# EAGLE board CT_schematic (EAGLE 7.6.0)

Size 100 x 80 mm. Coordinates in mm from the lower left corner, seen from the top.
Outline: 0,0 100,0 100,80 0,80 0,0
Copper layers (1*16): Top 0.035mm / dielectric 1.5mm / Bottom 0.035mm
Design rules "default": minimum track width 10mil, minimum drill 24mil, track to track 8mil, track to pad 8mil, pad to pad 8mil, via to via 8mil, smd to smd 8mil, copper to edge 40mil, drill to drill 8mil, minimum pad ring 10mil, minimum via ring 8mil, stop-mask expansion 4mil, vias tented up to drill 0mil, thermal gap 10mil

## Footprints (pad centres in the part's own frame; a part is rotated, then mirrored left to right if it is on the bottom)
C0603 = smd 0.8 x 0.8: 1 -0.762,0; 2 0.762,0
C0402 = smd 0.5 x 0.5: 1 -0.508,0; 2 0.508,0
C0805 = smd 1.2 x 1.3: 1 -1.016,0; 2 1.016,0
C1210 = smd 1.2 x 2.5: 1 -1.524,0; 2 1.524,0
EXV-9H = smd 3.505 x 1.676: 1 -2.857,0; 2 2.857,0
L0603 = smd 0.8 x 0.8: 1 -0.762,0; 2 0.762,0
DR1040 = smd 1.6 x 3.2: 1 -4.458,0; 2 4.458,0
PJ-037B_PACKAGE = drill 3.7 square: 1 12,0 | drill 3.2 square: 2 6,0
R0603 = smd 0.8 x 0.8: 1 -0.762,0; 2 0.762,0
WLCSP66_8X8 = smd 0.229 x 0.229: A1 -1.4,1.6; A2 -1,1.6; A3 -0.6,1.6; A4 -0.2,1.6; A5 0.2,1.6; A6 0.6,1.6; A7 1,1.6; A8 1.4,1.6; B1 -1.4,1.2; B2 -1,1.2; B3 -0.6,1.2; B4 -0.2,1.2; B5 0.2,1.2; B6 0.6,1.2; B7 1,1.2; B8 1.4,1.2; C1 -1.4,0.8; C2 -1,0.8; C3 -0.6,0.8; C4 -0.2,0.8; C5 0.2,0.8; C6 0.6,0.8; C7 1,0.8; C8 1.4,0.8; D1 -1.4,0.4; D2 -1,0.4; D3 -0.6,0.4; D6 0.6,0.4; D7 1,0.4; D8 1.4,0.4; E1 -1.4,0; E2 -1,0; E3 -0.6,0; E6 0.6,0; E7 1,0; E8 1.4,0; F1 -1.4,-0.4; F2 -1,-0.4; F3 -0.6,-0.4; F6 0.6,-0.4; F7 1,-0.4; F8 1.4,-0.4; G1 -1.4,-0.8; G2 -1,-0.8; G3 -0.6,-0.8; G4 -0.2,-0.8; G5 0.2,-0.8; G6 0.6,-0.8; G7 1,-0.8; G8 1.4,-0.8; H1 -1.4,-1.2; H2 -1,-1.2; H3 -0.6,-1.2; H4 -0.2,-1.2; H5 0.2,-1.2; H6 0.6,-1.2; H7 1,-1.2; H8 1.4,-1.2; J1 -1.4,-1.6; J2 -1,-1.6; J3 -0.6,-1.6; J4 -0.2,-1.6; J5 0.2,-1.6; J6 0.6,-1.6; J7 1,-1.6; J8 1.4,-1.6
A2200-A = smd 1.5 x 0.8: 1 -4.85,6.35; 2 -4.85,5.08; 3 -4.85,3.81; 4 -4.85,2.54; 5 -4.85,1.27; 6 -4.85,0; 7 -4.85,-1.27; 8 -4.85,-2.54; 9 -4.85,-3.81; 10 -4.85,-5.08; 11 -4.85,-6.35; 12 4.85,-6.35; 13 4.85,-5.08; 14 4.85,-3.81; 15 4.85,-2.54; 16 4.85,-1.27; 17 4.85,0; 18 4.85,1.27; 19 4.85,2.54; 20 4.85,3.81; 21 4.85,5.08; 22 4.85,6.35 | smd 1.2 x 1.2: 23 -2,2; 24 -2,0; 25 -2,-2; 26 0,-2; 27 0,0; 28 0,2; 29 2,2; 30 2,0; 31 2,-2
COAXIAL_C = smd 1 x 1: 1 0,-1.5; 2 0,1.5 | smd 1.05 x 2.2: 3 -1.475,0; 4 1.475,0
SAMTEC_FTSH-105-01-L-DV-K = smd 0.762 x 2.794: 1 -2.54,-2.032; 2 -2.54,2.032; 3 -1.27,-2.032; 4 -1.27,2.032; 5 0,-2.032; 6 0,2.032; 7 1.27,-2.032; 8 1.27,2.032; 9 2.54,-2.032; 10 2.54,2.032
TDFN-8/6MM = smd 0.3 x 0.75: 1 0,0; 2 0.5,0; 3 1,0; 4 1.5,0; 5 1.5,3; 6 1,3; 7 0.5,3; 8 0,3
ASEK = smd 1.4 x 1: 1 -1.1,-0.8; 2 1.1,-0.8; 3 1.1,0.8; 4 -1.1,0.8
ASDMB-XX.XXXXMHZ-XX-XX-XXX = smd 0.65 x 0.85: 1 0.45,0.2; 2 2.05,0.2; 3 2.05,1.8; 4 0.45,1.8
TSOT-23-5 = smd 1.3 x 0.62: 1 -1.31,0.95; 2 -1.31,0; 3 -1.31,-0.95; 4 1.31,-0.95; 5 1.31,0.95
WSON-8 = smd 0.3 x 0.6: 1 -0.75,0; 2 0.05,0; 3 0.85,0; 4 1.65,0; 5 1.65,3.8; 6 0.85,3.8; 7 0.05,3.8; 8 -0.75,3.8 | smd 3 x 2.6: PAD 0.45,1.9
SON-6 = smd 0.55 x 0.3: 1 -0.355,0.5 | smd 0.52 x 0.3: 2 -0.37,0; 3 -0.37,-0.5; 4 0.37,-0.5; 5 0.37,0; 6 0.37,0.5
DCU0008A_N = smd 0.5 x 0.3: 1 -1.6,0.75; 2 -1.6,0.25; 3 -1.6,-0.25; 4 -1.6,-0.75; 5 1.6,-0.75; 6 1.6,-0.25; 7 1.6,0.25; 8 1.6,0.75
SW_4-1437565-2 = smd 1.4 x 2.1: 1 -2.23,4.55; 2 -2.23,-4.55; 3 2.23,4.55; 4 2.23,-4.55
LGM67K-G1J2-24-Z = smd 0.8 x 1.4: A -2,0; C 0,0
NC7SZ125M5X = smd 1.3 x 0.7: 1 -1.3,0.95; 2 -1.3,0; 3 -1.3,-0.95; 4 1.3,-0.95; 5 1.3,0.95

## Placement (x,y rotation side)
C1  1e-06  [C0603]  -53.34,69.85 0 top  (outside the outline)
C2  1e-07  [C0603]  -57.15,69.85 0 top  (outside the outline)
C3  1e-07  [C0603]  -60.96,69.85 0 top  (outside the outline)
C4  1e-07  [C0603]  -64.77,69.85 0 top  (outside the outline)
C5  1e-07  [C0603]  -68.58,69.85 0 top  (outside the outline)
C6  1e-07  [C0603]  -15.24,74.93 0 top  (outside the outline)
C7  4.7e-06  [C0603]  -49.53,69.85 0 top  (outside the outline)
C8  1e-08  [C0603]  -19.05,74.93 0 top  (outside the outline)
C9  1e-06  [C0603]  -22.86,74.93 0 top  (outside the outline)
C10  1e-07  [C0402]  -57.15,74.93 0 top  (outside the outline)
C11  1e-07  [C0402]  -60.96,74.93 0 top  (outside the outline)
C12  1e-08  [C0402]  -64.77,74.93 0 top  (outside the outline)
C13  1e-08  [C0402]  -68.58,74.93 0 top  (outside the outline)
C14  1e-08  [C0402]  -15.24,80.01 0 top  (outside the outline)
C15  1e-05  [C0805]  -53.34,57.15 0 top  (outside the outline)
C16  1e-05  [C0805]  -58.42,57.15 0 top  (outside the outline)
C17  1e-06  [C0603]  -26.67,74.93 0 top  (outside the outline)
C18  1e-05  [C1210]  -29.21,58.42 0 top  (outside the outline)
C19  1e-07  [C0402]  -19.05,80.01 0 top  (outside the outline)
C20  0.0001  [EXV-9H]  -40.64,50.8 0 top  (outside the outline)
C21  0.0001  [EXV-9H]  -52.07,50.8 0 top  (outside the outline)
C22  1e-08  [C0402]  -22.86,80.01 0 top  (outside the outline)
C23  1e-07  [C0402]  -26.67,80.01 0 top  (outside the outline)
C24  1e-08  [C0402]  -30.48,80.01 0 top  (outside the outline)
C25  1e-07  [C0402]  -34.29,80.01 0 top  (outside the outline)
C26  1e-08  [C0402]  -38.1,80.01 0 top  (outside the outline)
C27  1e-08  [C0402]  -41.91,80.01 0 top  (outside the outline)
C28  1e-08  [C0402]  -45.72,80.01 0 top  (outside the outline)
F1  240.0  [L0603]  -30.48,74.93 0 top  (outside the outline)
I1  7e-06  [DR1040]  -54.61,27.94 0 top  (outside the outline)
J1  PJ-037B  [PJ-037B_PACKAGE]  -27.94,29.21 0 top  (outside the outline)
R2  1000.0  [R0603]  -34.29,74.93 0 top  (outside the outline)
R4  4700.0  [R0603]  -38.1,74.93 0 top  (outside the outline)
R5  4700.0  [R0603]  -41.91,74.93 0 top  (outside the outline)
R8  2200.0  [R0603]  -45.72,74.93 0 top  (outside the outline)
R9  2200.0  [R0603]  -49.53,74.93 0 top  (outside the outline)
R10  10000.0  [R0603]  -57.15,64.77 0 top  (outside the outline)
R11  10000.0  [R0603]  -62.23,64.77 0 top  (outside the outline)
R12  10000.0  [R0603]  -67.31,64.77 0 top  (outside the outline)
R13  10000.0  [R0603]  -15.24,69.85 0 top  (outside the outline)
R14  10000.0  [R0603]  -20.32,69.85 0 top  (outside the outline)
R15  10000.0  [R0603]  -25.4,69.85 0 top  (outside the outline)
R16  10000.0  [R0603]  -30.48,69.85 0 top  (outside the outline)
R17  5.0  [R0603]  -53.34,74.93 0 top  (outside the outline)
R18  490000.0  [R0603]  -26.67,64.77 0 top  (outside the outline)
R19  1000000.0  [R0603]  -16.51,64.77 0 top  (outside the outline)
R20  100000.0  [R0603]  -31.75,64.77 0 top  (outside the outline)
R21  153694.38  [R0603]  -21.59,64.77 0 top  (outside the outline)
R22  100000.0  [R0603]  -36.83,64.77 0 top  (outside the outline)
R23  10000.0  [R0603]  -35.56,69.85 0 top  (outside the outline)
R24  10000.0  [R0603]  -40.64,69.85 0 top  (outside the outline)
R25  82000.0  [R0603]  -45.72,69.85 0 top  (outside the outline)
R26  300000.0  [R0603]  -41.91,64.77 0 top  (outside the outline)
R27  120000.0  [R0603]  -46.99,64.77 0 top  (outside the outline)
R28  200000.0  [R0603]  -52.07,64.77 0 top  (outside the outline)
U1  STM32F378RCY6  [WLCSP66_8X8]  -60.96,49.53 0 top  (outside the outline)
U2  A2200-A  [A2200-A]  -25.4,10.16 0 top  (outside the outline)
U3  73412-0114  [COAXIAL_C]  -52.07,40.64 0 top  (outside the outline)
U4  FTSH-105-01-L-DV-K  [SAMTEC_FTSH-105-01-L-DV-K]  -54.61,7.62 0 top  (outside the outline)
U5  24AA04-I/MC  [TDFN-8/6MM]  -21.59,40.64 0 top  (outside the outline)
U6  ASEK-2-32.768KHz-ECST  [ASEK]  -31.75,50.8 0 top  (outside the outline)
U7  ASDMB-25.000MHZ-EC-T  [ASDMB-XX.XXXXMHZ-XX-XX-XXX]  -16.51,1.27 0 top  (outside the outline)
U8  ltc3406es5  [TSOT-23-5]  -63.5,57.15 0 top  (outside the outline)
U9  LP2951ACSDX/NOPB  [WSON-8]  -40.64,39.37 0 top  (outside the outline)
U10  TPS3895ADRYR  [SON-6]  -63.5,78.74 0 top  (outside the outline)
U11  LSF0102DCTR  [DCU0008A_N]  -58.42,78.74 0 top  (outside the outline)
U12  4-1437565-2  [SW_4-1437565-2]  -44.45,27.94 0 top  (outside the outline)
U13  Q65110A2395  [LGM67K-G1J2-24-Z]  -17.78,58.42 0 top  (outside the outline)
U14  nc7sz125m5x  [NC7SZ125M5X]  -34.29,57.15 0 top  (outside the outline)
U15  nc7sz125m5x  [NC7SZ125M5X]  -40.64,57.15 0 top  (outside the outline)
U16  nc7sz125m5x  [NC7SZ125M5X]  -46.99,57.15 0 top  (outside the outline)

## Library data of the parts
C1-C28 F1 I1 J1 R2 R4 R5 R8-R28 U1-U16 = circuit_tree

## Nets
CLK_U1_C8: U1.C8 U6.3
CLK_U1_D7: U1.D7 U7.3
GND: C1.2 C2.2 C3.2 C4.2 C5.2 C6.2 C7.2 C8.2 C9.2 C10.2 C11.2 C12.2 C13.2 C14.2 C15.2 C16.1 C16.2 C17.2 C18.2 C19.2 C20.2 C21.2 C22.2 C23.2 C24.2 C25.2 C26.2 C27.2 C28.2 J1.2 R2.2 R10.2 R11.2 R16.2 R17.2 R18.2 R22.2 R25.2 R27.2 U1.C6 U1.G4 U1.G5 U1.G8 U1.J1 U2.7 U2.8 U2.23 U2.24 U2.25 U2.26 U2.27 U2.28 U2.29 U2.30 U2.31 U4.3 U4.5 U5.4 U6.2 U7.2 U8.2 U9.3 U9.4 U9.PAD U10.2 U11.1 U13.C U14.2 U14.3 U15.1 U15.3 U16.1 U16.3
NET_U1_A6: U11.3
NET_U1_B1: R9.1 U1.B1 U5.5
NET_U1_B2: R8.1 U1.B2 U5.6
NET_U1_B6: U11.4
NET_U1_C7: R10.1 U1.C7
NET_U1_E7: R5.1 U1.E7 U16.4
NET_U1_G1: U1.G1
NET_U1_G2: R11.1 U1.G2
NET_U1_G7: C8.1 C9.1 F1.1 U1.G6 U1.G7 U1.H1
NET_U1_H1: U1.H1
NET_U1_J6: U13.A
NET_U1_J8: U12.3 U12.4
NET_U2_2: R12.2 U2.2
NET_U2_6: U2.6
NET_U2_17: R12.1 U2.17
NET_U2_19: U2.19
NET_U2_22: R4.1 U2.22 U15.4
NET_U3_1: U2.11 U3.1
NET_U3_2: U2.10 U3.2 U3.3 U3.4
NET_U4_9: R17.1 U4.9
NET_U8_1: U8.1
NET_U8_3: I1.1 U8.3
NET_U8_5: R18.1 R19.1 U8.5
NET_U8_ATNET_3: I1.2 R19.2
NET_U9_5: R20.1 U9.5
NET_U9_7: R21.2 R22.1 U9.7
NET_U10_1: R24.1 R25.1 U10.1
NET_U10_3: R26.2 R27.1 U10.3
NET_U10_4: R23.1 U10.4 U14.4 U15.2 U16.2
NET_U11_8: R28.1 U11.8
NET_U12_1: R2.1 U12.1 U12.2
PROC_I2C1_SCL_TOXCVR: U2.15 U11.5
PROC_I2C1_SDA_TOXCVR: U2.16 U11.6
PROC_SYS_JTCK_SWCLK: R16.1 U1.A1 U4.4
PROC_SYS_JTDI: R14.1 U1.A2 U4.8
PROC_SYS_JTDO_TRACESWO: U1.C5 U4.6
PROC_SYS_JTMS_SWDIO: R15.1 U1.C4 U4.2
RST_OUT_U4_JTAG_RST_B: R13.1 U4.10 U14.1
VCC_S1_4V8: C15.1 C17.1 C20.1 C21.1 J1.1 U8.4 U9.8
VCC_TIER1_1V8: C1.1 C2.1 C3.1 C4.1 C5.1 C6.1 C7.1 C11.1 C12.1 C13.1 C14.1 C16.2 C19.1 C24.1 C25.1 C26.1 C27.1 C28.1 F1.2 I1.2 R5.2 R8.2 R9.2 R13.2 R14.2 R15.2 R19.2 R23.2 R24.2 R26.1 U1.A8 U1.D6 U1.J7 U4.1 U5.7 U5.8 U6.4 U7.4 U10.6 U11.2 U14.5 U15.5 U16.5
VCC_TIER1_3V3: C10.1 C18.1 C22.1 C23.1 R4.2 R20.2 R21.1 R28.2 U2.20 U9.1 U11.7

## Tracks (layer width: path | path; a pad name or v marks a point on that pad's centre or on a via)
CLK_U1_C8  (1 unrouted)
CLK_U1_D7  (1 unrouted)
GND  (72 unrouted)
NET_U1_B1  (2 unrouted)
NET_U1_B2  (2 unrouted)
NET_U1_C7  (1 unrouted)
NET_U1_E7  (2 unrouted)
NET_U1_G2  (1 unrouted)
NET_U1_G7  (5 unrouted)
NET_U1_J8  (1 unrouted)
NET_U2_2  (1 unrouted)
NET_U2_17  (1 unrouted)
NET_U2_22  (2 unrouted)
NET_U3_1  (1 unrouted)
NET_U3_2  (3 unrouted)
NET_U4_9  (1 unrouted)
NET_U8_3  (1 unrouted)
NET_U8_5  (2 unrouted)
NET_U8_ATNET_3  (1 unrouted)
NET_U9_5  (1 unrouted)
NET_U9_7  (2 unrouted)
NET_U10_1  (2 unrouted)
NET_U10_3  (2 unrouted)
NET_U10_4  (4 unrouted)
NET_U11_8  (1 unrouted)
NET_U12_1  (2 unrouted)
PROC_I2C1_SCL_TOXCVR  (1 unrouted)
PROC_I2C1_SDA_TOXCVR  (1 unrouted)
PROC_SYS_JTCK_SWCLK  (2 unrouted)
PROC_SYS_JTDI  (2 unrouted)
PROC_SYS_JTDO_TRACESWO  (1 unrouted)
PROC_SYS_JTMS_SWDIO  (2 unrouted)
RST_OUT_U4_JTAG_RST_B  (2 unrouted)
VCC_S1_4V8  (6 unrouted)
VCC_TIER1_1V8  (42 unrouted)
VCC_TIER1_3V3  (10 unrouted)